# Altium PCB Ground_plate.PcbDoc
Units mm, origin at the board's own origin, x right, y up, seen from the top; angles counter-clockwise.
Board outline 240 x 200 mm, 2 copper layers (Top Layer, Bottom Layer); 41 components, 36 nets, 161 pads, 26 vias.
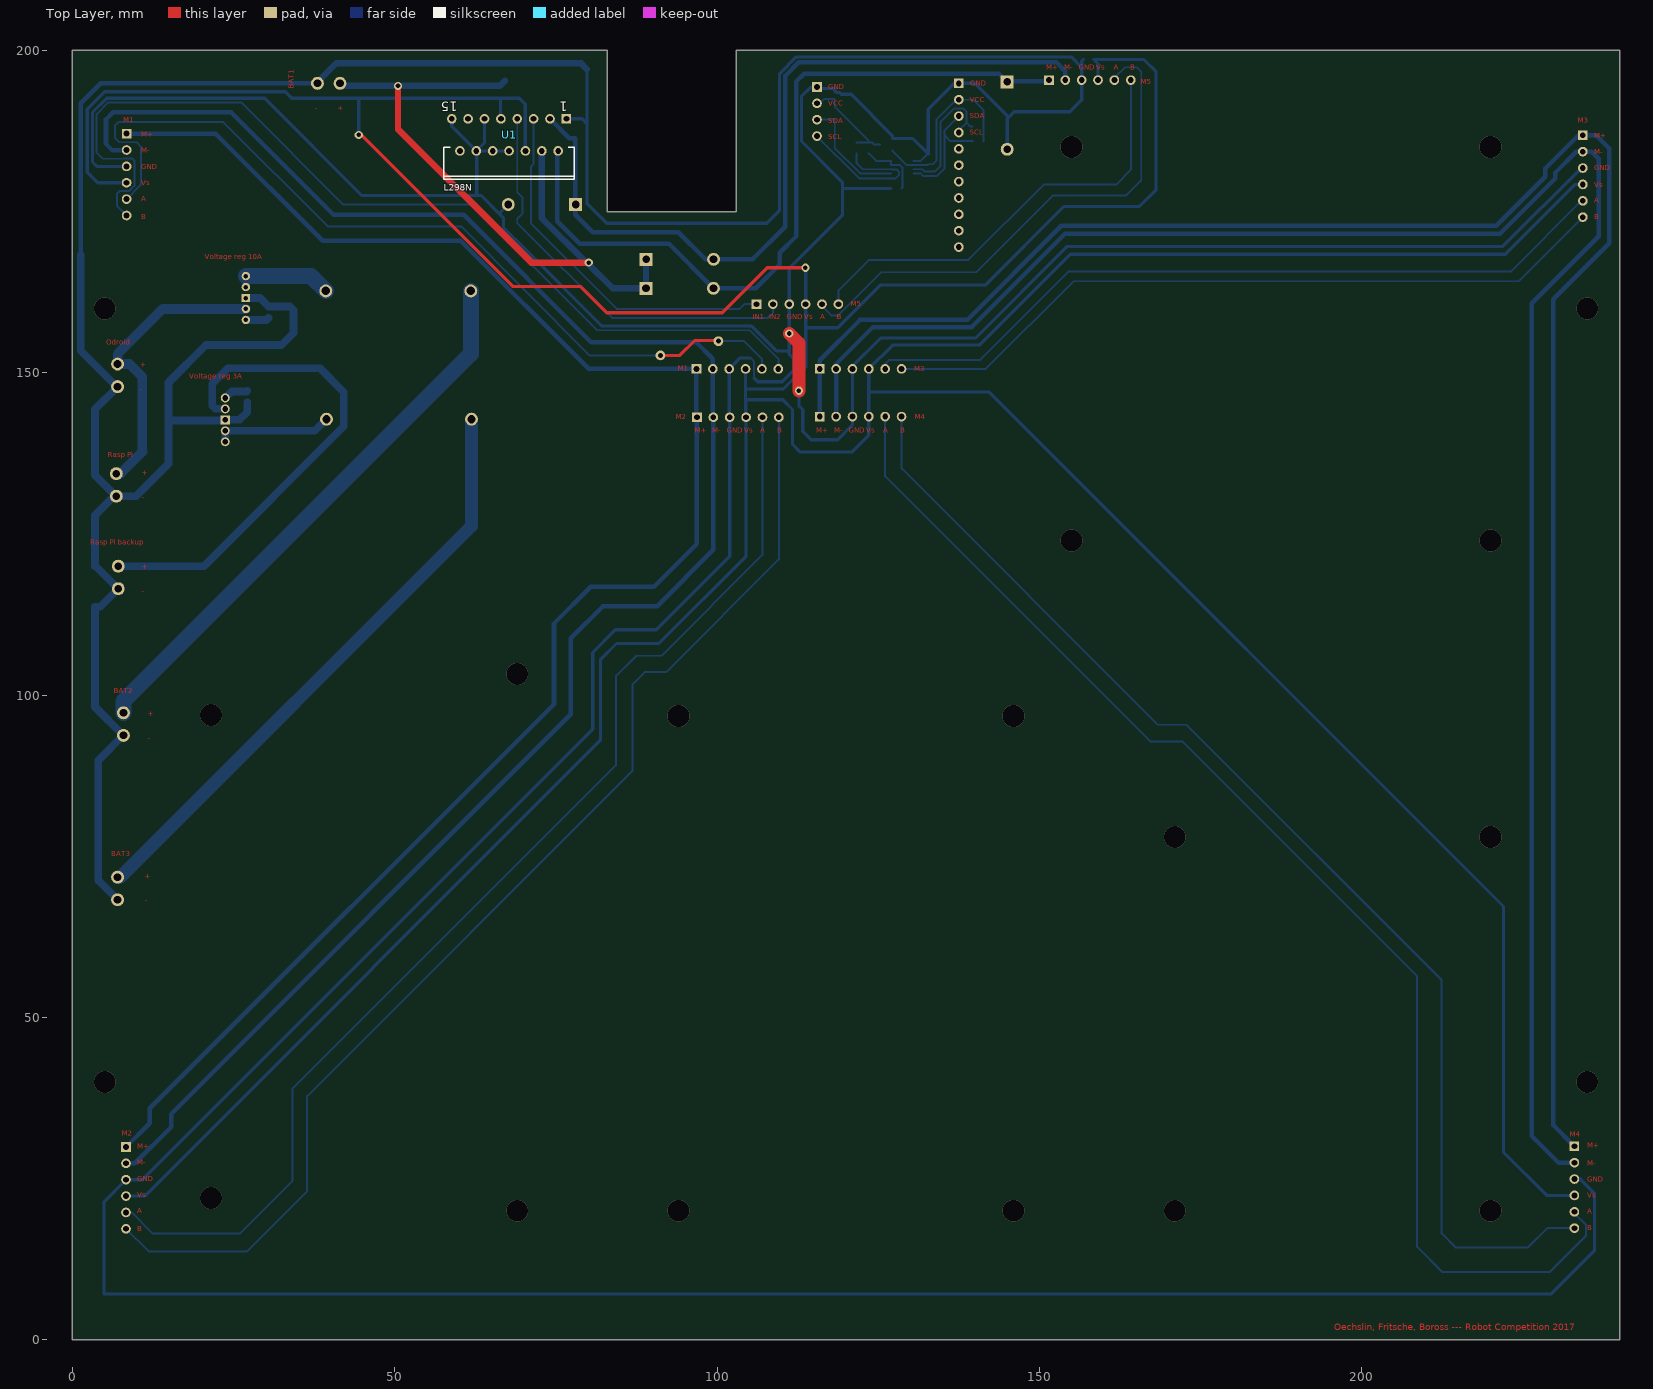
[diagram p0: Top Layer view]
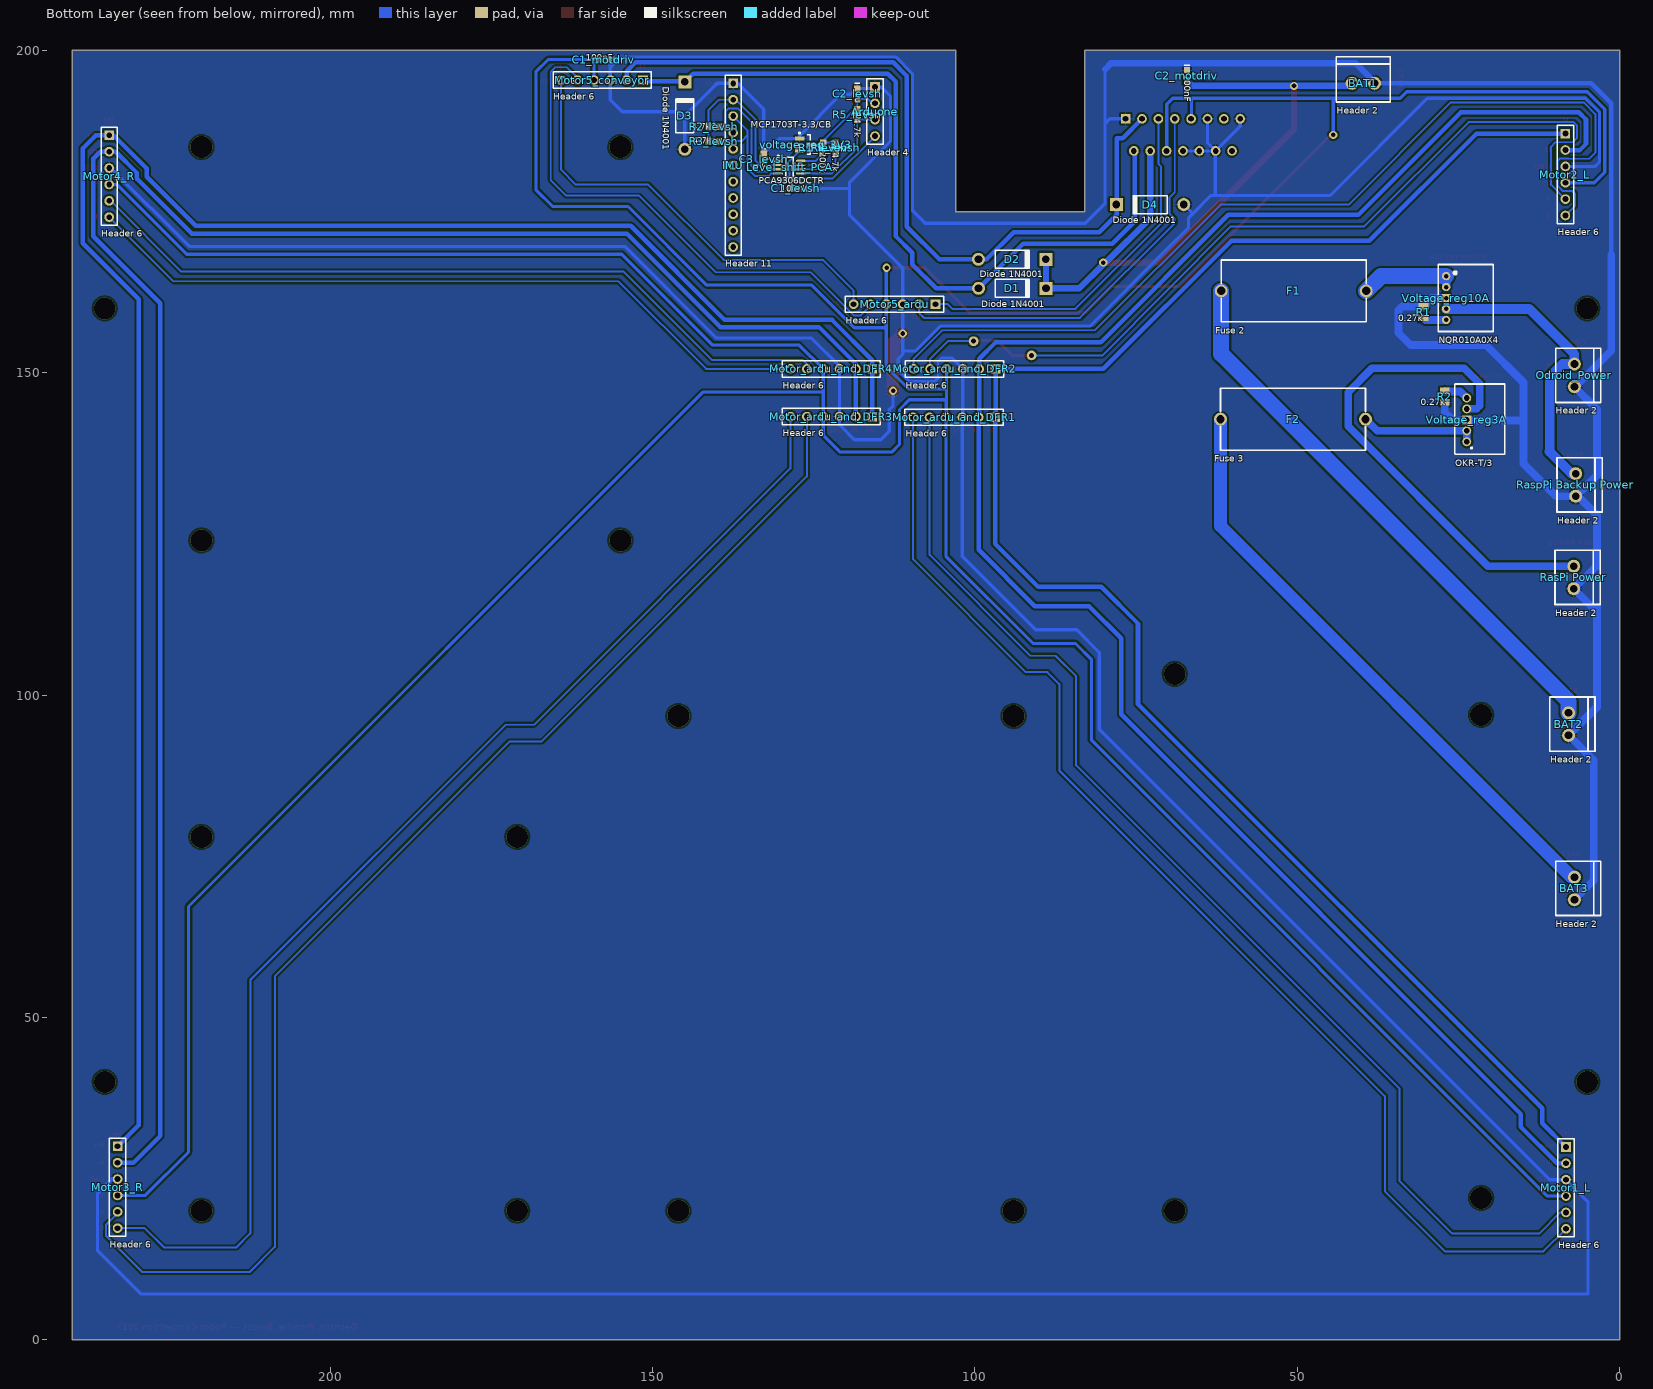
[diagram p1: Bottom Layer view, seen from below]

## Layer stack, top to bottom
Top Solder: solder mask 0.0102, Solder Resist, Dk 3.5
Top Layer: signal copper 0.0356
Dielectric 1: dielectric 0.32, FR-4, Dk 4.8
Bottom Layer: signal copper 0.0356
Bottom Solder: solder mask 0.0102, Solder Resist, Dk 3.5

## Board outline
0,0 0,200 83,200 83,175 103,175 103,200 240,200 240,0

## Design rules (kind name [scope] priority, off if disabled: settings)
Clearance Clearance_Polygons [InPolygon] p1: gap=0.3
Clearance [All] p2: gap=0.25
HoleSize [All] p1: absolutevalues=TRUE maxlimit=10 minlimit=0.6 maxpercent=80.000 minpercent=20.000
MinimumSolderMaskSliver [All] p1 off: minsoldermaskwidth=0.15
MinimumSolderMaskSliver SilkscreenOverComponentPads [All] p2 off: minsoldermaskwidth=0.254
PolygonConnect [All] p1: connectstyle=Relief reliefconductorwidth=0.254 reliefentries=4 polygonreliefangle="90 Angle" airgapwidth=0.254
RoutingVias [All] p1: holewidth=0.5 width=0.8 viastyle="Through Hole" minholewidth=0.35 minwidth=0.5 maxholewidth=1.5 maxwidth=2
SilkToSilkClearance [All] p1 off: silktosilkclearance=0.254
SolderMaskExpansion [All] p1: expansion=0.102
Width [All] p1: maxlimit=5 minlimit=0.25 preferedwidth=0.5
27 further rules are at their usual default settings.

## Classes and differential pairs
component class wheelmotor_connections: Motor1_L Motor2_L Motor3_R Motor4_R Motor_ardu_and_DFR1 Motor_ardu_and_DFR2 Motor_ardu_and_DFR3 Motor_ardu_and_DFR4
component class Motor_driver: BAT1 C1_motdriv C2_motdriv D1 D2 D3 D4 Motor5_ardu Motor5_conveyor U1
component class IMU_level_shifter: Arduone C1_levsh C2_levsh C3_levsh IMU Level_shift_PCA R1_levsh R2_levsh R3_levsh R4_levsh R5_levsh voltage_reg_3V3
component class DCDC_converters: BAT2 BAT3 F1 F2 Odroid_Power R1 R2 "RasPi Power" "RaspPi Backup Power" Voltage_reg3A Voltage_reg10A

## Components (designator, comment, footprint, x,y, rotation, side; value= is the part's Value field where it differs from the comment)
Arduone "Header 4" HDR1X4 115.5,194.34 r270 bottom
BAT1 "Header 2" STL1550/2-3.5 39.75,194.9 r180 bottom
BAT2 "Header 2" STL1550/2-3.5 7.9,95.5 r270 bottom
BAT3 "Header 2" STL1550/2-3.5 7,70 r270 bottom
C1_levsh "100n" CAPC1608N 127.8,178.6 r0 bottom
C1_motdriv "100nF" CAPC1608N 157.6,198.6 r0 bottom
C2_levsh "1u" CAPC1608N 118.25,193.3 r270 bottom
C2_motdriv "100nF" CAPC1608N 67.1,196.1 r270 bottom
C3_levsh "1u" CAPC1608N 132.75,183.15 r270 bottom
D1 "Diode 1N4001" DO-41 94.2,163.1 r180 bottom
D2 "Diode 1N4001" DO-41 94.23,167.6 r180 bottom
D3 "Diode 1N4001" DO-41 145,189.9 r90 bottom
D4 "Diode 1N4001" DO-41 72.83,176.1 r0 bottom
F1 "Fuse 2" FUSE_22.5MM 61.8,162.7 r180 bottom
F2 "Fuse 3" FUSE_22.5MM 61.9,142.8 r180 bottom
IMU "Header 11" HDR1X11 137.5,194.9 r270 bottom
Level_shift_PCA "PCA9306DCTR" DCT8_N 128.75,181.9 r180 bottom
Motor1_L "Header 6" HDR1X6 8.3,29.9 r270 bottom
Motor2_L "Header 6" HDR1X6 8.4,187.1 r270 bottom
Motor3_R "Header 6" HDR1X6 233,30 r270 bottom
Motor4_R "Header 6" HDR1X6 234.3,186.84 r270 bottom
Motor5_ardu "Header 6" HDR1X6 106.12,160.64 r0 bottom
Motor5_conveyor "Header 6" HDR1X6 151.48,195.4 r0 bottom
Motor_ardu_and_DFR1 "Header 6" HDR1X6 96.88,143.1 r0 bottom
Motor_ardu_and_DFR2 "Header 6" HDR1X6 96.8,150.6 r0 bottom
Motor_ardu_and_DFR3 "Header 6" HDR1X6 115.92,143.2 r0 bottom
Motor_ardu_and_DFR4 "Header 6" HDR1X6 115.92,150.6 r0 bottom
Odroid_Power "Header 2" STL1550/2-3.5 7,149.6 r270 bottom
R1 "0.27k" 0805_G 30.4,159.4 r270 bottom
R1_levsh "200k" RESC1608N 123.5,184.9 r270 bottom
R2 "0.27k" 0805_G 27.1,146.3 r90 bottom
R2_levsh "4.7k" RESC1608N 140.5,188.2 r0 bottom
R3_levsh "4.7k" RESC1608N 140.5,185.9 r0 bottom
R4_levsh "4.7k" RESC1608N 121.6,184.9 r90 bottom
R5_levsh "4.7k" RESC1608N 118.25,190.05 r90 bottom
"RasPi Power" "Header 2" STL1550/2-3.5 7.1,118.25 r270 bottom
"RaspPi Backup Power" "Header 2" STL1550/2-3.5 6.8,132.6 r270 bottom
U1 "L298N" MULTIWAT15 67.73,186.91 r180 top
Voltage_reg3A "OKR-T/3" DC_Converter_3A 23.7,142.7 r180 bottom
Voltage_reg10A "NQR010A0X4" DC_Converter_10A 26.9,161.6 r180 bottom
voltage_reg_3V3 "MCP1703T-3.3/CB" SOT23-3N 126.25,185.4 r180 bottom

## Footprints (in the part's own frame and the unit in brackets; to place one, negate y for a bottom-side part, rotate by r counter-clockwise, add the part's x,y. Pads: shape width x height; smd on the part's side, far side on the other; paste and mask are expansions set on the pad)
0805_G [mm] "Modified 0805 pattern (reduced size)"
  rect 1x1.5 smd: 1(-0.9,0) 2(0.9,0)
  body extent -1,-0.63 1,0.63, height 0.6
CAPC1608N [mm] "Chip Capacitor, Body 1.6x0.8mm, IPC Medium Density"
  rect 1x1 smd: 1(-0.8,0) 2(0.8,0)
  silkscreen extent -1.6,-0.4 -1.6,0.4, body extent -0.87,-0.48 0.87,0.48, height 0.85
DC_Converter_3A [mm] "Throu-Hole size10.4x5.6padding1.7"
  round 1.4 hole 0.9: 1(0,-3.4) 4(0,1.7) 5(0,3.4)
  round 1.4 hole 0.9 paste+0: 2(0,-1.7)
  rect 1.4x1.4 hole 0.9: 3(0,0)
  silkscreen extent -1.85,-5.35 5.9,5.55
DC_Converter_10A [mm] "Throu-Hole size10.4x8.43padding1.74"
  round 1.3 hole 0.7: 1(0,3.4) 2(0,1.7) 4(0,-1.7) 5(0,-3.4)
  rect 1.3x1.3 hole 0.7: 3(0,0)
  silkscreen extent -1.2,-5.2 7.3,5.2
DCT8_N [mm] "TSOP, 8-Leads, Body 3x2.8mm, Pitch 0.65mm, IPC Medium Density"
  oval 1.5x0.35 smd: 1(-1.75,0.975) 2(-1.75,0.325) 3(-1.75,-0.325) 4(-1.75,-0.975) 5(1.75,-0.975) 6(1.75,-0.325) 7(1.75,0.325) 8(1.75,0.975)
  silkscreen extent -1.88,-1.57 0.6,1.82, body extent -1.45,-1.57 1.45,1.58, height 1.3
DO-41 [mm] "Diode, Axial; Body 5.2 x 2.7 mm (LxDia. max), Lead Dia. 0.86 mm (max)"
  round 2 hole 1.2: 1(-5.23,0)
  rect 2x2 hole 1.2: 2(5.23,0)
  silkscreen extent -2.65,-1.4 2.75,1.4
FUSE_22.5MM [mm] "Fuse support, 22.5mm wide"
  round 2 hole 1.3: 1(0,0) 2(22.5,0)
  silkscreen extent 0,-4.8 22.5,4.8, body extent 0,-4.8 22.5,4.8, height 11.5
HDR1X4 [mm] "Connector; Header; 4 Position"
  rect 1.5x1.5 hole 0.9: 1(0,0)
  round 1.5 hole 0.9: 2(2.54,0) 3(5.08,0) 4(7.62,0)
  silkscreen extent -1.27,-1.27 8.89,1.27
HDR1X6 [mm] "Connector; Header; 6 Position"
  rect 1.5x1.5 hole 0.9: 1(0,0)
  round 1.5 hole 0.9: 2(2.54,0) 3(5.08,0) 4(7.62,0) 5(10.16,0) 6(12.7,0)
  silkscreen extent -1.27,-1.27 13.97,1.27
HDR1X11 [mm] "Connector; Header; 11 Position"
  rect 1.5x1.5 hole 0.9: 1(0,0)
  round 1.5 hole 0.9: 2(2.54,0) 3(5.08,0) 4(7.62,0) 5(10.16,0) 6(12.7,0) 7(15.24,0) 8(17.78,0) 9(20.32,0) 10(22.86,0) 11(25.4,0)
  silkscreen extent -1.27,-1.27 26.67,1.27
MULTIWAT15 [mm] "TO, Thru-Hole, Vertical, Heatsink Mounted; 15 Bent Staggered Leads; Pitch 1.27 mm"
  rect 1.5x1.5 hole 0.9: 1(-8.89,-2.49)
  round 1.5 hole 0.9: 2(-7.62,2.49) 3(-6.35,-2.49) 4(-5.08,2.49) 5(-3.81,-2.49) 6(-2.54,2.49) 7(-1.27,-2.49) 8(0,2.49) 9(1.27,-2.49) 10(2.54,2.49) 11(3.81,-2.49) 12(5.08,2.49) 13(6.35,-2.49) 14(7.62,2.49) 15(8.89,-2.49)
  silkscreen extent -10.1,1.89 10.1,6.89
RESC1608N [mm] "Chip Resistor, Body 1.6x0.8mm, IPC Medium Density"
  rect 0.9x1 smd: 1(-0.85,0) 2(0.85,0)
  silkscreen extent -0.2,-0.4 0.2,0.4, body extent -0.85,-0.48 0.85,0.48, height 0.6
SOT23-3N [mm] "SOT23, 3-Leads, Body 2.9x1.3mm, Pitch 0.95mm, Lead Span 2.5mm, IPC Medium Density"
  rect 1.5x0.6 smd: 1(-0.95,0.95) 2(-0.95,-0.95) 3(0.95,0)
  silkscreen extent -1.07,-1.5 0.7,1.92, body extent -0.7,-1.5 0.7,1.5, height 1.1
STL1550/2-3.5 [mm] "STL1550 pin strip, 3.5 mm pitch"
  round 2 hole 1.2: 1(-1.75,0) 2(1.75,0)
  silkscreen extent -4.2,-2.9 4.2,4.1, body extent -4.2,-2.9 4.2,4.1, height 9.2

## Part data
Arduone: "Header, 4-Pin"
BAT1 BAT2 BAT3 Odroid_Power "RasPi Power" "RaspPi Backup Power": "Header, 2-Pin"
C1_levsh C1_motdriv C2_levsh C2_motdriv C3_levsh: library part Cap, "Capacitor"
D1 D2 D3 D4: "1 Amp General Purpose Rectifier"
F1 F2: library part "Fuse 1", "Fuse"
IMU: "Header, 11-Pin"
Level_shift_PCA: "Dual Bi-Directional I2C-Bus and SMBus Voltage Level-Translator, 0 to 5.5 V, -40 to 85 degC, 8-pin SM8 (DCT), Green (RoHS & no Sb/Br)"
Motor1_L Motor2_L Motor3_R Motor4_R Motor5_ardu Motor5_conveyor Motor_ardu_and_DFR1 Motor_ardu_and_DFR2 Motor_ardu_and_DFR3 Motor_ardu_and_DFR4: "Header, 6-Pin"
R1 R2: library part Res3, "Resistor"
R1_levsh R2_levsh R3_levsh R4_levsh R5_levsh: library part Res1, "Resistor"
U1: "Dual Full Bridge Driver"
Voltage_reg3A: "DCDC Converter 3Amps"
Voltage_reg10A: "DCDC Converter 10Amps"
voltage_reg_3V3: library part MCP1703T/CB, "250 mA, 16V, Low Quiescent Current LDO Regulator"

## Free pads (board coordinates)
  round 1.524 hole 0.762: 2(91.2,152.7) 3(100.2,154.9)

## Via types
v1: diameter 3.4, hole 3.4, Top Layer to Bottom Layer, 20 vias
v2: diameter 1.27, hole 0.711, Top Layer to Bottom Layer, 6 vias

## Nets (pads, with @x,y where several pads share a name; then routed paths per layer and width w, separated by ;. In a path a pad name is that pad's centre, name@x,y a point inside that pad or via, vN(x,y) a via of type N, cw(c..) or ccw(c..) an arc to the next point about the centre after c; other vN are vias at no path point)
3V3: C3_levsh.2 IMU.2 Level_shift_PCA.2 R2_levsh.2 R3_levsh.2 voltage_reg_3V3.2 | length 28.5
  Bottom Layer w0.3: voltage_reg_3V3.2 129.425,182.225 Level_shift_PCA.2 132.625,182.225 C3_levsh.2 133.45,182.35 134.05,182.95 134.05,189.299 137.111,192.36 IMU.2 139.74,192.36 141.35,190.75 141.35,186.9 R3_levsh.2
5V: C1_motdriv.2 Motor1_L.4 Motor2_L.4 Motor3_R.4 Motor4_R.4 Motor5_ardu.4 Motor5_conveyor.4 Motor_ardu_and_DFR1.4 Motor_ardu_and_DFR2.4 Motor_ardu_and_DFR3.4 Motor_ardu_and_DFR4.4 U1.6 U1.9 | length 827.3
  Top Layer w0.5: v2(44.4,186.9) 44.8,186.9 68.3,163.4 78.8,163.4 82.9,159.3 100.8,159.3 107.8,166.3 v2(113.7,166.3)
  Bottom Layer w0.5: Motor1_L.4 11.18,22.28 81.9,93 81.9,105.5 84.4,108 90.94,108 104.5,121.56 Motor_ardu_and_DFR1.4 ; Motor2_L.4 3.92,179.48 2.3,181.1 2.3,190.9 5,193.6 33,193.6 34,192.6 44.4,192.6 ; v2(44.4,186.9) 44.4,192.6 ; U1.9 66.4,189.46 66.4,192.6 ; U1.6 70.25,184.44 70.25,191.65 69.3,192.6 66.4,192.6 ; Motor_ardu_and_DFR2.4 104.42,147.5 ; v2(113.7,166.3) 113.74,166.26 Motor5_ardu.4 113.74,157 ; 123.64,148.7 123.54,148.8 ; Motor5_conveyor.4 159.1,197.9 C1_motdriv.2 166.2,198.6 168.1,196.7 168.1,178.4 165.5,175.8 153.8,175.8 141.6,163.6 125.3,163.6 118.7,157 113.74,157 ; Motor3_R.4 228.72,22.38 222,29.1 222,67.2 142.2,147 123.54,147 ; Motor4_R.4 233.12,179.22 222.3,168.4 154.8,168.4 140.7,154.3 127.24,154.3 Motor_ardu_and_DFR4.4 123.54,148.8 ; 44.4,192.6 66.4,192.6 ; 104.42,147.5 110.3,147.5 113.74,150.94 113.74,157 ; 104.42,147.5 104.42,143.18 Motor_ardu_and_DFR1.4 ; Motor_ardu_and_DFR1.4 104.5,145.8 110.2,145.8 111.7,144.3 111.7,138.9 112.9,137.7 120.9,137.7 123.54,140.34 Motor_ardu_and_DFR3.4 123.54,147 ; 123.54,147 123.54,148.8
5V_ls: Arduone.2 C2_levsh.2 R1_levsh.1 R4_levsh.2 R5_levsh.2 voltage_reg_3V3.3 | length 15.8
  Bottom Layer w0.3: Arduone.2 115.9,191.8 116.6,192.5 C2_levsh.2 118.25,191.25 123.5,186 R1_levsh.1 ; R4_levsh.2 R1_levsh.1 ; voltage_reg_3V3.3 124.4,185.4 124.05,185.75 R1_levsh.1
7V2: BAT1.1 C2_motdriv.2 D1.2 D2.2 U1.4 | length 106.8
  Top Layer w1: v2(50.5,194.5) 50.5,187.8 71.2,167.1 v2(80.1,167.1)
  Bottom Layer w1: BAT1.1 41.9,194.5 v2(50.5,194.5) 66.3,194.5 C2_motdriv.2 ; U1.4 72.81,173.99 79.7,167.1 v2(80.1,167.1) 80.1,166.8 83.8,163.1 D1.2 88.97,167.57 D2.2
GND: "RasPi Power.2" "RaspPi Backup Power.2" Arduone.1 BAT1.2 BAT2.2 BAT3.2 C1_levsh.1 C1_motdriv.1 C2_levsh.1 C2_motdriv.1 C3_levsh.1 D3.1 D4.1 IMU.1 Level_shift_PCA.1 Motor1_L.3 Motor2_L.3 Motor3_R.3 Motor4_R.3 Motor5_ardu.3 Motor5_conveyor.3 Motor_ardu_and_DFR1.3 Motor_ardu_and_DFR2.3 Motor_ardu_and_DFR3.3 Motor_ardu_and_DFR4.3 Odroid_Power.2 R1.1 R2.1 U1.1 U1.8 U1.10 U1.11 U1.12 U1.15 Voltage_reg3A.3 Voltage_reg10A.3 voltage_reg_3V3.1 | length 1324.9
  Top Layer w2: v2(111.2,156.1) 112.7,154.6 v2(112.7,147.2)
  Bottom Layer w0.3: 105.2,152.3 105.76,151.74 105.76,149.14 ; Level_shift_PCA.1 131.575,182.875 132.65,183.95 C3_levsh.1
  Bottom Layer w0.5: Motor2_L.3 3.78,182.02 3.1,182.7 3.1,190.4 5.3,192.6 29.8,192.6 44.9,177.5 62.7,177.5 ; U1.15 58.84,188.23 U1.12 ; U1.11 63.92,185.69 U1.12 ; D4.1 66.25,174.75 66.15,174.75 ; U1.8 U1.10 U1.12@62.7,184.42 ; U1.1 79.06,189.4 79.8,188.66 ; 79.8,197.1 79.8,188.66 ; 105.2,152.3 103.58,152.3 Motor_ardu_and_DFR2.3 101.88,143.18 Motor_ardu_and_DFR1.3 101.96,121.52 90.57,110.13 84.23,110.13 80.7,106.6 80.7,94.7 10.82,24.82 Motor1_L.3 4.9,21.42 4.9,7.1 229.4,7.1 236.1,13.8 236.1,22.7 233.88,24.92 ; 105.76,149.14 106.3,148.6 110.1,148.6 111.9,150.4 111.9,152.2 111.2,152.9 111.2,153.3 ; v2(112.7,147.2) 112.7,144.9 113.3,144.3 113.3,140.9 114.6,139.6 118.7,139.6 121,141.9 Motor_ardu_and_DFR3.3 Motor_ardu_and_DFR4.3 121,151 125.4,155.4 140.1,155.4 154.3,169.6 221.9,169.6 234.06,181.76 Motor4_R.3 ; 119.6,178.6 C1_levsh.1 ; D3.1 145,189.4 145.25,189.65 ; C1_motdriv.1 156.56,198.36 156.56,197.36 ; U1.12 U1.12@62.7,184.37 ; U1.12 U1.12@62.7,184.42 ; 62.7,177.5 U1.12@62.7,184.37 ; 62.7,177.5 63.4,177.5 66.15,174.75 ; U1.12@62.7,184.37 U1.12@62.7,184.42 ; 66.15,174.75 66.86,174.04 66.86,172.54 70.32,169.08 82.15,157.25 105.35,157.25 109.2,153.4 111.1,153.4 111.2,153.3 ; 79.8,188.66 79.8,176.3 82.9,173.2 107.7,173.2 109.7,175.2 109.7,196.4 112.3,199 154.92,199 156.56,197.36 ; 111.2,153.3 v2(111.2,156.1) Motor5_ardu.3 111.2,166.2 119.45,174.45 119.45,179.55 113.1,185.9 113.1,192.9 114.5,194.3 115.46,194.3 Arduone.1 115.74,194.1 C2_levsh.1 118.25,193.75 118.5,193.5 118.957,193.5 119.25,193.207 120.793,193.207 127.2,186.8 voltage_reg_3V3.1 130.35,186.35 C3_levsh.1 132.75,190.85 136.8,194.9 IMU.1 140,194.9 145.25,189.65 ; 145.25,189.65 146.1,190.5 154.72,190.5 156.56,192.34 Motor5_conveyor.3 156.56,197.36
  Bottom Layer w0.7: 1.3,168.3 1.3,191.8 4.4,194.9 BAT1.2 ; Motor3_R.3 233.88,24.92
  Bottom Layer w1: BAT1.2@37.8,194.9 40.9,198 78.9,198 79.8,197.1
  Bottom Layer w1.2: 1.3,168.3 1.3,153.4 6.85,147.85 Odroid_Power.2 3.5,144.35 3.5,134.1 6.45,131.15 6.45,130.85 ; BAT3.2 4,71.25 4,89.85 BAT2.2 3.5,98.15 3.5,113.7 4.3,113.7 7.1,116.5 3.6,120 3.5,120 3.5,127.9 6.45,130.85 ; Voltage_reg10A.3 29.1,161.6 R1.1 33.7,160.3 34.3,159.7 34.3,156.2 32.4,154.3 20.7,154.3 14.9,148.5 14.9,142.6 ; R2.1 27.1,143.9 25.9,142.7 Voltage_reg3A.3 23.6,142.6 14.9,142.6 ; 6.45,130.85 6.8,130.85 9.85,130.85 14.9,135.9 14.9,142.6
M5+: D1.1 D3.2 Motor5_conveyor.1 U1.2 | length 121.1
  Bottom Layer w0.7: U1.2 75.2,184.27 75.2,173.5 78.7,170 92.53,170 D1.1 106,163.1 109.7,166.8 109.7,168.6 112.25,171.15 112.25,195.15 113.5,196.4 143.73,196.4 D3.2 145.07,195.2 151.28,195.2 Motor5_conveyor.1
M5-: D2.1 D4.2 Motor5_conveyor.2 U1.3 | length 124.2
  Bottom Layer w0.7: U1.3 77.08,186.4 78,186.4 78,174.5 80.7,171.8 94,171.8 98.2,167.6 D2.1 105.5,167.6 110.55,172.65 110.55,196.048 112.652,198.15 152.65,198.15 154.02,196.78 Motor5_conveyor.2
M5_dir: Motor5_ardu.1 U1.5 | length 57.2
  Bottom Layer w0.3: U1.5 71.54,182.43 71.1,181.99 71.1,173.2 84.4,159.9 103.5,159.9 104.24,160.64 Motor5_ardu.1
M5_speed: Motor5_ardu.2 U1.7 | length 64.3
  Bottom Layer w0.3: U1.7 69,178 69.8,177.2 69.8,174.7 69,173.9 69,173.2 83.7,158.5 107.9,158.5 108.66,159.26 Motor5_ardu.2
"M+ left": Motor1_L.1 Motor2_L.1 Motor_ardu_and_DFR1.1 Motor_ardu_and_DFR2.1 | length 266.7
  Bottom Layer w0.7: Motor1_L.1 12,33.6 12,35.9 74.7,98.6 74.7,111.1 80.395,116.795 90.205,116.795 96.88,123.47 Motor_ardu_and_DFR1.1 96.8,143.18 Motor_ardu_and_DFR2.1 80.1,150.6 60.2,170.5 38.8,170.5 22.2,187.1 Motor2_L.1
"M+ right": Motor3_R.1 Motor4_R.1 Motor_ardu_and_DFR3.1 Motor_ardu_and_DFR4.1 | length 307.1
  Bottom Layer w0.7: Motor_ardu_and_DFR3.1 Motor_ardu_and_DFR4.1 115.92,151.96 122.16,158.2 138.8,158.2 153.4,172.8 220.9,172.8 228.5,180.4 228.5,181.7 233.64,186.84 Motor4_R.1 236.36,186.84 238.4,184.8 238.4,170.1 229.7,161.4 229.7,33.3 Motor3_R.1
"M- left": Motor1_L.2 Motor2_L.2 Motor_ardu_and_DFR1.2 Motor_ardu_and_DFR2.2 | length 286.3
  Bottom Layer w0.7: Motor1_L.2@8.16,27.5 Motor1_L.2 9.66,27.36 15.3,33 15.3,35 77.3,97 77.3,108.8 82.3,113.8 90.7,113.8 99.42,122.52 Motor_ardu_and_DFR1.2 99.34,143.18 Motor_ardu_and_DFR2.2 99.34,152.16 96.8,154.7 80.5,154.7 60.7,174.5 40.5,174.5 24.6,190.4 6.3,190.4 5.2,189.3 5.2,185.5 6.14,184.56 Motor2_L.2
"M- right": Motor3_R.2 Motor4_R.2 Motor_ardu_and_DFR3.2 Motor_ardu_and_DFR4.2 | length 305.3
  Bottom Layer w0.7: Motor_ardu_and_DFR3.2 Motor_ardu_and_DFR4.2 118.46,151.36 124.2,157.1 139.5,157.1 154,171.6 221.5,171.6 230,180.1 230,181 233.3,184.3 Motor4_R.2 235.7,184.3 236.8,183.2 236.8,171.2 226.4,160.8 226.4,31.6 230.54,27.46 Motor3_R.2
NetArduone_3: Arduone.3 Level_shift_PCA.5 R5_levsh.1 | length 17.5
  Bottom Layer w0.3: Arduone.3 118.19,189.26 R5_levsh.1 118.25,184.85 122.175,180.925 Level_shift_PCA.5
NetArduone_4: Arduone.4 Level_shift_PCA.6 R4_levsh.1 | length 25.3
  Bottom Layer w0.3: Arduone.4@114.98,186.72 Arduone.4 122.07,180.15 127.684,180.15 128.2,180.666 128.2,181.184 127.834,181.55 127.025,181.55 Level_shift_PCA.6 122.625,181.575 121.6,182.6 R4_levsh.1
NetC1_levsh_2: C1_levsh.2 Level_shift_PCA.7 Level_shift_PCA.8 R1_levsh.2 | length 9.9
  Bottom Layer w0.3: R1_levsh.2 124.675,182.875 Level_shift_PCA.8 Level_shift_PCA.7 128.375,182.225 128.75,181.85 128.75,178.75 C1_levsh.2
NetF1_2: F1.2 Voltage_reg10A.1 Voltage_reg10A.2 | length 15.1
  Bottom Layer w1.3: Voltage_reg10A.2 Voltage_reg10A.1
  Bottom Layer w2.5: Voltage_reg10A.1 37,165 F1.2
NetF2_2: F2.2 Voltage_reg3A.1 Voltage_reg3A.2 | length 18.1
  Bottom Layer w1.2: Voltage_reg3A.1 Voltage_reg3A.2 37.6,141 F2.2
NetIMU_3: IMU.3 Level_shift_PCA.4 R3_levsh.1 | length 19.3
  Bottom Layer w0.3: Level_shift_PCA.4 131.575,180.925 132,180.5 134.1,180.5 135.25,181.65 135.25,186.9 ; IMU.3 135.25,187.57 135.25,186.9 ; R3_levsh.1 139.61,185.94 136.21,185.94 135.25,186.9
NetIMU_4: IMU.4 Level_shift_PCA.3 R2_levsh.1 | length 21.9
  Bottom Layer w0.3: Level_shift_PCA.3 131.825,181.575 132.2,181.2 133.8,181.2 134.65,182.05 134.65,188.85 136.82,191.02 138.18,191.02 138.7,190.5 138.7,188.8 ; IMU.4@137.78,187 IMU.4 137.5,187.6 138.7,188.8 ; R2_levsh.1 139.3,188.2 138.7,188.8
NetMotor1_L_5: Motor1_L.5 Motor_ardu_and_DFR1.5 | length 181.5
  Bottom Layer w0.3: Motor1_L.5 9.16,19.74 12.4,16.5 26,16.5 34.1,24.6 34.1,38.9 84.3,89.1 84.3,102.9 87.5,106.1 91.39,106.1 107.04,121.75 Motor_ardu_and_DFR1.5
NetMotor1_L_6: Motor1_L.6 Motor_ardu_and_DFR1.6 | length 185.8
  Bottom Layer w0.3: Motor1_L.6 11.8,13.7 27.1,13.7 36.4,23 36.4,37.8 86.9,88.3 86.9,101.7 88.77,103.57 92.1,103.57 109.58,121.05 Motor_ardu_and_DFR1.6
NetMotor2_L_5: Motor2_L.5 Motor_ardu_and_DFR2.5 pad.2 pad.3 | length 134.9
  Top Layer w0.3: pad.3@100.1,155 pad.3
  Top Layer w0.5: pad.2 94.2,152.7 96.5,155 pad.3@100.1,155
  Bottom Layer w0.3: Motor2_L.5 8.406,176.94 10.6,179.134 10.6,185.1 9.94,185.76 7.24,185.76 6.6,186.4 6.6,188.4 7.1,188.9 23.4,188.9 39.6,172.7 60.28,172.7 80.188,152.7 pad.2 ; pad.3 104.2,154.9 106.96,152.14 Motor_ardu_and_DFR2.5
NetMotor2_L_6: Motor2_L.6 Motor_ardu_and_DFR2.6 | length 148.1
  Bottom Layer w0.3: Motor2_L.6 6.9,175.9 6.9,177.8 7.3,178.2 8.817,178.2 9.6,178.983 9.6,182.9 9.28,183.22 7.903,183.22 7.883,183.2 4.7,183.2 3.75,184.15 3.75,190.131 5.569,191.95 26.15,191.95 42,176.1 61.9,176.1 81.4,156.6 105.081,156.6 109.5,152.181 Motor_ardu_and_DFR2.6
NetMotor3_R_5: Motor3_R.5 Motor_ardu_and_DFR3.5 | length 200.5
  Bottom Layer w0.3: Motor_ardu_and_DFR3.5 126.08,133.92 167.2,92.8 172.2,92.8 208.6,56.4 208.6,14.4 212.5,10.5 229.2,10.5 234.8,16.1 234.8,17.8 233,19.6 Motor3_R.5
NetMotor3_R_6: Motor3_R.6 Motor_ardu_and_DFR3.6 | length 186.7
  Bottom Layer w0.3: Motor_ardu_and_DFR3.6 128.62,135.18 168.4,95.4 172.8,95.4 212.4,55.8 212.4,16.5 214.6,14.3 225.8,14.3 228.8,17.3 Motor3_R.6
NetMotor4_R_5: Motor4_R.5 Motor_ardu_and_DFR4.5 | length 119.5
  Bottom Layer w0.3: Motor_ardu_and_DFR4.5 126.08,151.38 126.7,152 140.8,152 154.5,165.7 223.1,165.7 234.08,176.68 Motor4_R.5
NetMotor4_R_6: Motor4_R.6 Motor_ardu_and_DFR4.6 | length 115.4
  Bottom Layer w0.3: Motor_ardu_and_DFR4.6 141.7,150.6 155.3,164.2 224.36,164.2 Motor4_R.6
NetMotor5_ardu_5: Motor5_ardu.5 Motor5_conveyor.5 | length 81.4
  Bottom Layer w0.3: Motor5_ardu.5 116.28,160.32 117.7,158.9 118.777,158.9 125.477,165.6 140.2,165.6 152.1,177.5 163.4,177.5 165.8,179.9 165.8,196.7 165.1,197.4 163.3,197.4 161.64,195.74 Motor5_conveyor.5
NetMotor5_ardu_6: Motor5_ardu.6 Motor5_conveyor.6 | length 69.1
  Bottom Layer w0.3: Motor5_ardu.6 118.82,162.72 123.6,167.5 139,167.5 150.7,179.2 161.9,179.2 164.2,181.5 164.2,189.4 164.18,189.42 Motor5_conveyor.6
NetR1_2: R1.2 Voltage_reg10A.5 | length 3.6
  Bottom Layer w1.2: Voltage_reg10A.5 30.1,158.2 R1.2
NetR2_2: R2.2 Voltage_reg3A.5 | length 3.9
  Bottom Layer w1.2: Voltage_reg3A.5 24.7,147.1 27,147.1 R2.2
VCC_5V_3A: "RasPi Power.1" Voltage_reg3A.4 | length 77.8
  Bottom Layer w1.2: 7.1,120 20.4,120 42.1,141.7 42.1,147 38.4,150.7 24.1,150.7 21.7,148.3 21.7,144.9 22.2,144.4 Voltage_reg3A.4
VCC_5V_10A: "RaspPi Backup Power.1" Odroid_Power.1 Voltage_reg10A.4 | length 46.1
  Bottom Layer w1.5: 6.8,134.35 7.45,134.35 10.9,137.8 10.8,137.9 10.8,149.4 8.85,151.35 Odroid_Power.1 7,152.9 14,159.9 Voltage_reg10A.4
VCC_B2_10A: BAT2.1 F1.1 | length 87.8
  Bottom Layer w2.5: BAT2.1 7.9,99.021 61.8,152.921 F1.1
VCC_B3_3A: BAT3.1 F2.1 | length 94
  Bottom Layer w2: BAT3.1 7.42,71.75 61.9,126.23 F2.1
pads on no net: IMU.5 IMU.6 IMU.7 IMU.8 IMU.9 IMU.10 IMU.11 U1.13 U1.14
copper on no net:
  other v1: 69,20 94,20 146,20 171,20 220,20 21.46,22 5,40 235,40 171,78 220,78 94,96.73 146,96.73 21.46,96.93 69,103.28 155,124 220,124 5,160 235,160 155,185 220,185

## Polygon pours and split planes (outlines as drawn)
GND on Bottom Layer "Bottom Layer-No Net" (solid, pour order 2): 0,200 0,0 240,0 240,200 103,200 103,175 83,175 83,200

## Other copper
Top Layer:
  text "M+" at 151.1,197 h0.8
  text "M-" at 153.85,197 h0.8
  text "GND" at 156.1,197 h0.8
  text "Vs" at 158.85,197 h0.8
  text "A" at 161.5,197 h0.8
  text "B" at 164.1,197 h0.8
  text "M5" at 165.75,194.75 h0.8
  text "GND" at 139.3,194.5 h0.8
  text "BAT1" at 34.3,194.1 h0.8 r90
  text "GND" at 117.25,193.95 h0.8
  text "VCC" at 139.2,192 h0.8
  text "VCC" at 117.25,191.45 h0.8
  text "-" at 38,191.3 h0.8 r180
  text "+" at 41.9,190.6 h0.8 r90
  text "SDA" at 139.2,189.5 h0.8
  text "M1" at 7.9,188.85 h0.8
  text "M3" at 233.5,188.75 h0.8
  text "SDA" at 117.25,188.7 h0.8
  text "SCL" at 139.2,186.9 h0.8
  text "M+" at 10.65,186.6 h0.8
  text "M+" at 236.1,186.4 h0.8
  text "SCL" at 117.25,186.2 h0.8
  text "M-" at 10.65,184.1 h0.8
  text "M-" at 236.1,183.9 h0.8
  text "GND" at 10.65,181.6 h0.8
  text "GND" at 236.1,181.4 h0.8
  text "Vs" at 10.65,179.1 h0.8
  text "Vs" at 236.1,178.8 h0.8
  text "A" at 10.65,176.6 h0.8
  text "A" at 236.1,176.4 h0.8
  text "B" at 10.65,173.85 h0.8
  text "B" at 236.1,173.8 h0.8
  text "Voltage reg 10A" at 20.5,167.6 h0.8
  text "M5" at 120.7,160.3 h0.8
  text "IN1" at 105.5,158.3 h0.8
  text "IN2" at 108.1,158.3 h0.8
  text "GND" at 110.8,158.3 h0.8
  text "Vs" at 113.55,158.3 h0.8
  text "A" at 116,158.3 h0.8
  text "B" at 118.6,158.3 h0.8
  text "Odroid" at 5.25,154.35 h0.8
  text "+" at 10.5,150.85 h0.8
  text "M1" at 93.9,150.3 h0.8
  text "M3" at 130.6,150.2 h0.8
  text "Voltage reg 3A" at 18.1,149.1 h0.8
  text "-" at 10.5,147.1 h0.8
  text "M2" at 93.6,142.8 h0.8
  text "M4" at 130.7,142.8 h0.8
  text "M+" at 96.5,140.7 h0.8
  text "M-" at 99.25,140.7 h0.8
  text "GND" at 101.5,140.7 h0.8
  text "Vs" at 104.25,140.7 h0.8
  text "A" at 106.7,140.7 h0.8
  text "B" at 109.3,140.7 h0.8
  text "M+" at 115.4,140.7 h0.8
  text "M-" at 118.15,140.7 h0.8
  text "GND" at 120.4,140.7 h0.8
  text "Vs" at 123.15,140.7 h0.8
  text "A" at 125.8,140.7 h0.8
  text "B" at 128.4,140.7 h0.8
  text "Rasp Pi" at 5.5,136.9 h0.8
  text "+" at 10.75,134.1 h0.8
  text "-" at 10.75,130.35 h0.8
  text "Rasp Pi backup" at 2.75,123.3 h0.8
  text "+" at 10.75,119.55 h0.8
  text "-" at 10.75,115.8 h0.8
  text "BAT2" at 6.4,100.25 h0.8
  text "+" at 11.65,96.75 h0.8
  text "-" at 11.65,93 h0.8
  text "BAT3" at 6,75 h0.8
  text "+" at 11.25,71.5 h0.8
  text "-" at 11.25,67.75 h0.8
  text "M2" at 7.65,31.65 h0.8
  text "M4" at 232.25,31.5 h0.8
  text "M+" at 235,29.75 h0.8
  text "M+" at 10.05,29.6 h0.8
  text "M-" at 10.05,27.1 h0.8
  text "M-" at 235,27 h0.8
  text "GND" at 10.05,24.6 h0.8
  text "GND" at 235,24.5 h0.8
  text "Vs" at 10.05,22.1 h0.8
  text "Vs" at 235,22 h0.8
  text "A" at 10.05,19.6 h0.8
  text "A" at 235,19.5 h0.8
  text "B" at 235,17 h0.8
  text "B" at 10.05,16.85 h0.8
  text "Oechslin, Fritsche, Boross --- Robot Competition 2017" at 195.75,1.5 h1

## Silkscreen, mask and mechanical layers (free items; w line width, h text height)
Mechanical 1:
  lines w0.254: -6.8,4 -1.8,4 ; -6.5,196.4 -1.5,196.4 ; -4.3,1.5 -4.3,6.5 ; -4,193.9 -4,198.9 ; 243.1,3.1 248.1,3.1 ; 243.6,196.3 248.6,196.3 ; 245.6,0.6 245.6,5.6 ; 246.1,193.8 246.1,198.8 ; 0,0 0,200 83,200 83,175 103,175 103,200 240,200 240,0 0,0

## Text inside footprints (layer, text, board x,y; h text height)
U1: Top Overlay "1" at 76.85,192.025 h1.5 r180; Top Overlay "15" at 59.79,192.025 h1.5 r180